# EAGLE board TrackerNoGPlane (EAGLE 8.3.2)
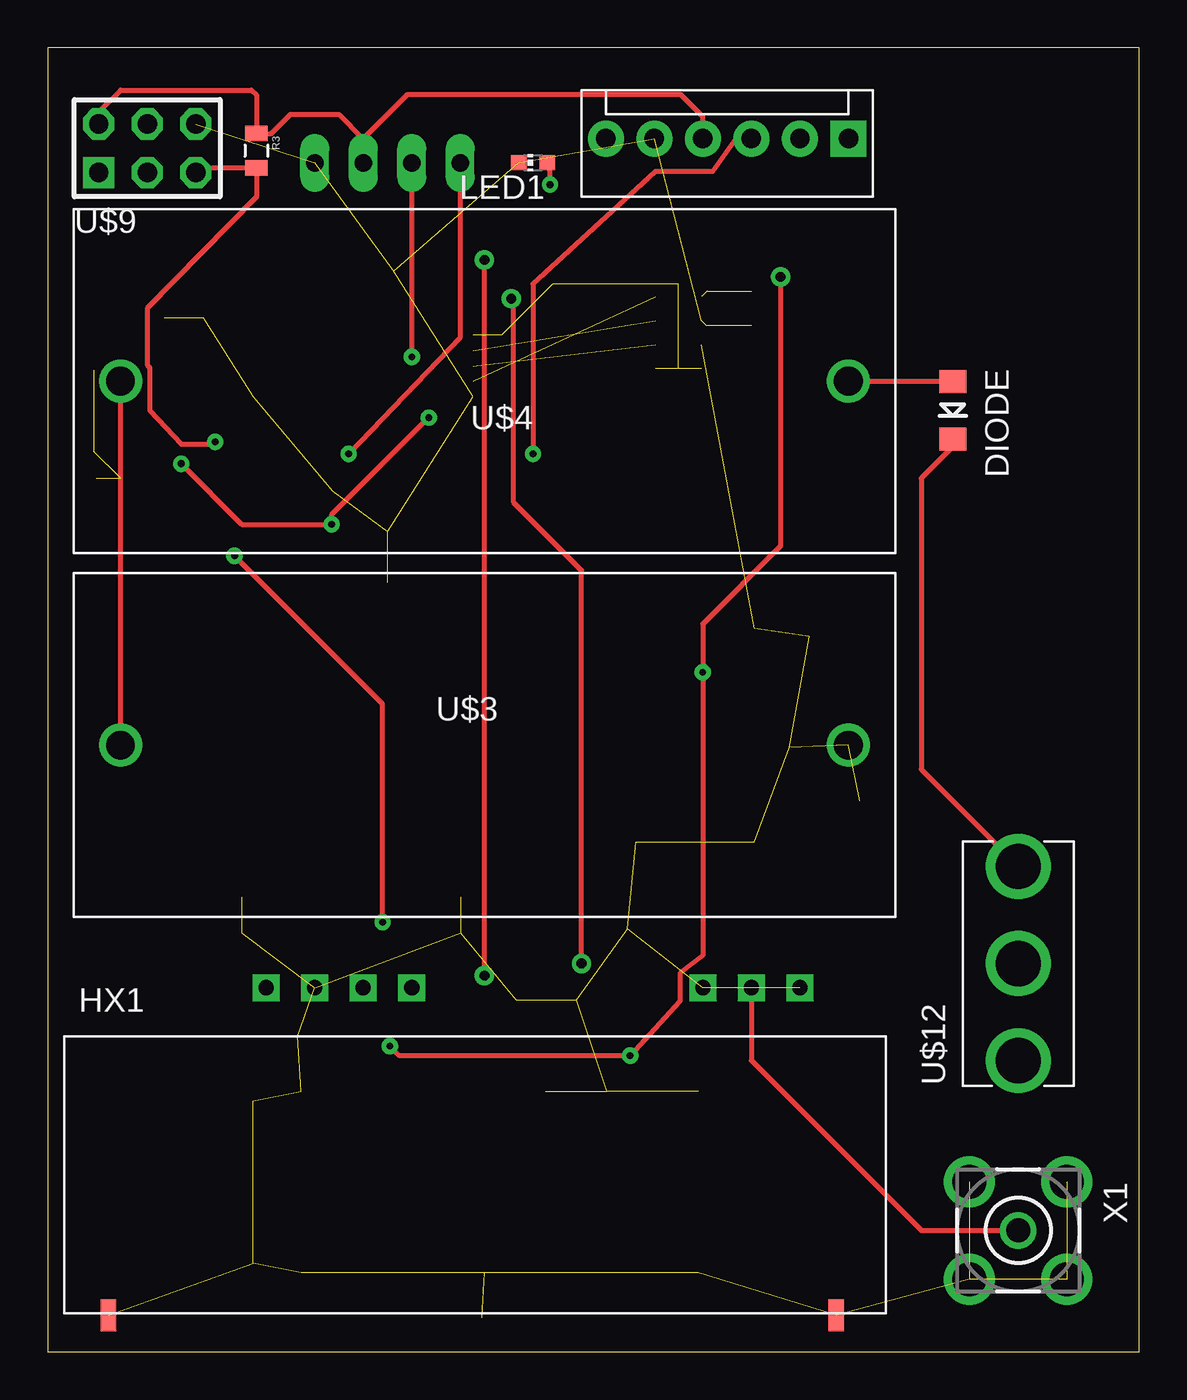
[diagram p0: board, top side]
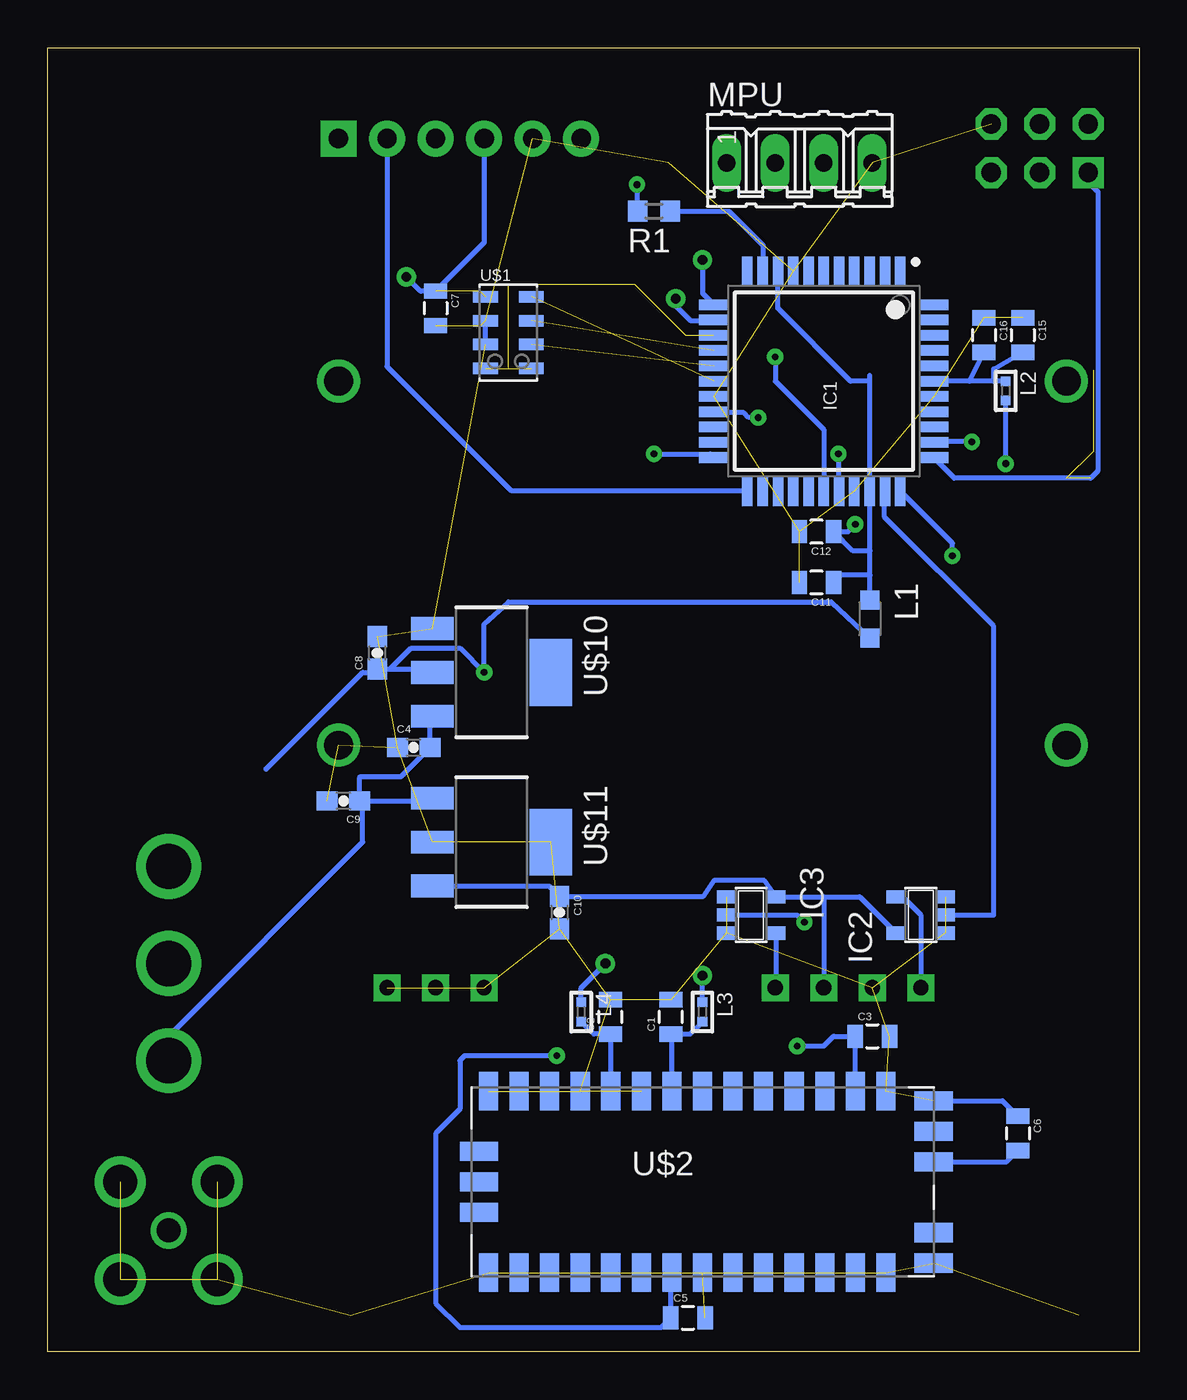
[diagram p1: board, bottom side, seen from below]

Size 57.13 x 68.25 mm. Coordinates in mm from the lower left corner, seen from the top.
Outline: 0,0 57.13,0 57.13,68.25 0,68.25 0,0
Copper layers (1*16): Top 0.035mm / dielectric 1.5mm / Bottom 0.035mm
Design rules "SparkFun": minimum track width 8mil, minimum drill 20mil, track to track 8mil, track to pad 8mil, pad to pad 8mil, via to via 8mil, smd to smd 8mil, copper to edge 8mil, drill to drill 8mil, minimum pad ring 12mil, minimum via ring 10mil, stop-mask expansion 4mil, vias tented up to drill 20mil, thermal gap 10mil

## Footprints (pad centres in the part's own frame; a part is rotated, then mirrored left to right if it is on the bottom)
0805 = smd 0.8 x 1.2: 1 -0.9,0; 2 0.9,0
0603-CAP = smd 1.1 x 1: 1 -0.85,0; 2 0.85,0
LILYPAD-WEARABLES_LED-1206 = smd 1.2 x 1.4: A -1.5,0; C 1.5,0
QFP80P1200X1200X120-44N = smd 1.55 x 0.55: 1 -5.75,4; 2 -5.75,3.2; 3 -5.75,2.4; 4 -5.75,1.6; 5 -5.75,0.8; 6 -5.75,0; 7 -5.75,-0.8; 8 -5.75,-1.6; 9 -5.75,-2.4; 10 -5.75,-3.2; 11 -5.75,-4; 23 5.75,-4; 24 5.75,-3.2; 25 5.75,-2.4; 26 5.75,-1.6; 27 5.75,-0.8; 28 5.75,0; 29 5.75,0.8; 30 5.75,1.6; 31 5.75,2.4; 32 5.75,3.2; 33 5.75,4 | smd 0.55 x 1.55: 12 -4,-5.75; 13 -3.2,-5.75; 14 -2.4,-5.75; 15 -1.6,-5.75; 16 -0.8,-5.75; 17 0,-5.75; 18 0.8,-5.75; 19 1.6,-5.75; 20 2.4,-5.75; 21 3.2,-5.75; 22 4,-5.75; 34 4,5.75; 35 3.2,5.75; 36 2.4,5.75; 37 1.6,5.75; 38 0.8,5.75; 39 0,5.75; 40 -0.8,5.75; 41 -1.6,5.75; 42 -2.4,5.75; 43 -3.2,5.75; 44 -4,5.75
SOT23-5 = smd 0.69 x 0.99: 1 -0.95,-1.29; 2 0,-1.29; 3 0.95,-1.29; 4 0.95,1.3; 5 -0.95,1.3
MOLEX-1X6 = drill 1.016 pad 1.88 square: 1 0,0 | drill 1.016 pad 1.88: 2 2.54,0; 3 5.08,0; 4 7.62,0; 5 10.16,0; 6 12.7,0
L2012C = smd 1 x 1: 1 -1,0; 2 1,0
L0402 = smd 0.5 x 0.5: 1 -0.508,0; 2 0.508,0
CHIP-LED0603 = smd 0.8 x 0.8: A 0,-0.75; C 0,0.75
HX1 = drill 0.8 square: 0V 25.4,-8.89; EN 20.32,-8.89; RFGND1 0,-8.89; RFGND2 5.08,-8.89; RFOUT 2.54,-8.89; TXD 27.94,-8.89; VCC 22.86,-8.89 | smd 0.813 x 1.676: BODYGND1 -1.905,8.255; BODYGND2 36.195,8.255
04P = drill 0.914 long: 1 -3.81,0; 2 -1.27,0; 3 1.27,0; 4 3.81,0
R0603 = smd 1 x 1.1: 1 -0.85,0; 2 0.85,0
MS5611-01BA01 = smd 1.3 x 0.6: 1 -1.2,1.875; 2 -1.2,0.625; 3 -1.2,-0.625; 4 -1.2,-1.875; 5 1.2,-1.875; 6 1.2,-0.625; 7 1.2,0.625; 8 1.2,1.875
M10382-A1 = smd 1 x 2: 1 -1.05,12.1; 2 -2.65,12.1; 3 -4.25,12.1; 18 -1.6,-11.7; 19 0,-11.7; 20 1.6,-11.7; 35 4.25,12.1; 36 2.65,12.1 | smd 2 x 1: 4 -4.75,9.6; 5 -4.75,8; 6 -4.75,6.4; 7 -4.75,4.8; 8 -4.75,3.2; 9 -4.75,1.6; 10 -4.75,0; 11 -4.75,-1.6; 12 -4.75,-3.2; 13 -4.75,-4.8; 14 -4.75,-6.4; 15 -4.75,-8; 16 -4.75,-9.6; 17 -4.75,-11.2; 21 4.75,-11.2; 22 4.75,-9.6; 23 4.75,-8; 24 4.75,-6.4; 25 4.75,-4.8; 26 4.75,-3.2; 27 4.75,-1.6; 28 4.75,0; 29 4.75,1.6; 30 4.75,3.2; 31 4.75,4.8; 32 4.75,6.4; 33 4.75,8; 34 4.75,9.6
CR-123-A_HOLDER = drill 1.5: + -19.05,0; - 19.05,0
AVR-ISP-6 = drill 1.016 square: 1 -2.54,-1.27 | drill 1.016 octagon: 2 -2.54,1.27; 3 0,-1.27; 4 0,1.27; 5 2.54,-1.27; 6 2.54,1.27
SOT-223 = smd 1.2 x 2.2: 1 -2.3,1.1; 2 0,1.1; 3 2.3,1.1 | smd 3.5 x 2.2: 4 0,7.3
ZMCHFL3R = drill 2.375: 1 -5.08,0; 2 0,0; 3 5.08,0
BU-SMA-V = drill 1.27: 1 0,0 | drill 1.778: 2 -2.55,2.55; 3 2.55,2.55; 4 2.55,-2.55; 5 -2.55,-2.55

## Placement (x,y rotation side)
C1  22pF  [0805]  24.51,17.53 90 bottom
C2  22pF  [0805]  27.69,17.53 90 bottom
C3  22pF  [0805]  13.97,16.51 0 bottom
C4  1uF  [0603-CAP]  37.97,31.62 0 bottom
C5  22pF  [0805]  23.62,1.78 0 bottom
C6  18pF  [0805]  6.35,11.43 270 bottom
C7  100nF  [0805]  36.83,54.61 270 bottom
C8  1uF  [0603-CAP]  39.88,36.58 90 bottom
C9  .47uF  [0603-CAP]  41.66,28.83 180 bottom
C10  22uF  [0603-CAP]  30.35,22.99 270 bottom
C11  10uF  [0805]  16.89,40.26 180 bottom
C12  100nF  [0805]  16.89,42.93 180 bottom
C15  10uF  [0805]  6.1,53.21 270 bottom
C16  100nF  [0805]  8.13,53.21 270 bottom
DIODE  [LILYPAD-WEARABLES_LED-1206]  47.37,49.28 270 top
IC1  [QFP80P1200X1200X120-44N]  16.51,50.8 270 bottom
IC2  74AHC1G125DBV  [SOT23-5]  11.43,22.86 90 bottom
IC3  74AHC1G125DBV  [SOT23-5]  20.32,22.86 270 bottom
JP4  [MOLEX-1X6]  41.91,63.5 180 top
L1  10uH  [L2012C]  14.1,38.35 270 bottom
L2  FB_0402  [L0402]  6.99,50.29 270 bottom
L3  FB_0402  [L0402]  22.86,17.78 270 bottom
L4  FB_0402  [L0402]  29.21,17.78 270 bottom
LED1  [CHIP-LED0603]  25.4,62.23 90 top
M1  HX1  [HX1]  39.37,10.16 180 top
MPU  [04P]  17.78,62.23 0 bottom
R1  220  [R0603]  25.4,59.69 180 bottom
R3  10kOhm  [0805]  10.92,62.87 270 top
U$1  MS5611QFN  [MS5611-01BA01]  33.02,53.34 0 bottom
U$2  M10382-A1  [M10382-A1]  22.86,8.89 270 bottom
U$3  123_BATTERY_HOLDERCR-123-A  [CR-123-A_HOLDER]  22.86,31.75 0 top
U$4  123_BATTERY_HOLDERCR-123-A  [CR-123-A_HOLDER]  22.86,50.8 180 top
U$9  AVR-PDIVERT  [AVR-ISP-6]  5.21,62.99 0 top
U$10  AZ1117EH3.3  [SOT-223]  38.1,35.56 270 bottom
U$11  LM2940-5  [SOT-223]  38.1,26.67 270 bottom
U$12  CKN10160-ND  [ZMCHFL3R]  50.8,20.32 90 top
X1  BU-SMA-V  [BU-SMA-V]  50.8,6.35 270 top

## Library data of the parts
C1-C12 C15 C16 JP4 R3 = SparkFun
DIODE U$10 U$11 = Physoon
IC1 = xmega-a4
IC2 IC3 = 74xx-little-us
L1 = rcl
L2-L4 = rc-master-smd
LED1 = led
M1 = trackuino
MPU = con-amp-quick; OC_FARNELL: unknown; OC_NEWARK: unknown
R1 = resistor
U$1-U$4 U$12 = SHC
U$9 = avr-7
X1 = con-coax; OC_FARNELL: unknown; OC_NEWARK: unknown

## Nets
5V: C10.1 IC2.5 IC3.5 M1.VCC U$11.3
BATT: C4.2 C9.1 U$10.3 U$11.1 U$12.1
EN-5V: IC3.4 M1.EN
GND: C1.2 C2.2 C3.2 C4.1 C5.2 C6.1 C6.2 C7.2 C8.2 C9.2 C10.2 C11.2 C12.2 C15.1 C16.1 IC1.8 IC1.18 IC1.30 IC1.38 IC2.1 IC2.3 IC3.1 IC3.3 JP4.5 LED1.C M1.0V M1.BODYGND1 M1.BODYGND2 M1.RFGND1 M1.RFGND2 MPU.4 U$1.2 U$1.3 U$2.1 U$2.2 U$2.3 U$2.4 U$2.12 U$2.14 U$2.17 U$2.21 U$2.24 U$2.26 U$2.28 U$2.33 U$2.34 U$2.35 U$2.36 U$3.- U$9.6 U$10.1 U$11.2 U$11.4 X1.2 X1.3 X1.4 X1.5
LED: IC1.10 R1.1
MISOC: IC1.16 U$1.6
MOSIC: IC1.15 U$1.7
N$1: C1.1 L3.2 U$2.11
N$2: C2.1 L4.2 U$2.13
N$4: U$3.+ U$4.-
N$5: M1.RFOUT X1.1
N$6: DIODE.A U$4.+
N$10: LED1.A R1.2
N$11: DIODE.C U$12.3
N$17: C15.2 C16.2 IC1.39 L2.1
N$18: C11.1 C12.1 IC1.9 IC1.19 IC1.31 L1.1 L2.2
PDI-CLK: IC1.35 R3.2 U$9.5
PDI-DATA: IC1.34 U$9.1
RXC: IC1.12 L3.1
RXD: IC1.22 JP4.3
RXE: IC1.32 IC2.2
SCLE: IC1.29 MPU.1
SCLKC: IC1.17 U$1.8
SDAD: IC1.28 MPU.2
SSC: IC1.14 U$1.4 U$1.5
TXC: IC1.13 L4.1
TXD: IC1.23 JP4.2
TXD-5V: IC2.4 M1.TXD
TXE: IC1.33 IC3.2
VCC: C3.1 C5.1 C7.1 C8.1 JP4.4 L1.2 MPU.3 R3.1 U$1.1 U$2.5 U$2.27 U$9.2 U$10.2

## Tracks (layer width: path | path; a pad name or v marks a point on that pad's centre or on a via)
5V
  Bottom 0.254: 16.51,23.81 IC3.5 19.64,24.69 22.22,24.69 22.82,23.84 C10.1 30.89,24.37 U$11.3 | 16.51,23.81 14.63,23.81 IC2.5 | 16.51,23.81 M1.VCC
BATT
  Bottom 0.254: C4.2 37,31.5 | C4.2 37.12,33.14 U$10.3 | U$12.1 50.8,16.51 40.64,26.67 40.64,28.66 C9.1 | C4.2 38.65,30.1 40.77,30.1 40.81,30.06 C9.1 | C9.1 37.14,28.83 U$11.1
EN-5V
  Bottom 0.254: IC3.4 19.02,19.08 M1.EN
GND  (54 unrouted)
  Bottom 0.254: U$1.3 U$1.2 | U$2.3 7.16,13.14 C6.1 | U$2.1 6.94,9.94 C6.2
LED
  Bottom 0.254: R1.1 22.86,59.69 | 22.86,59.69 22.2,59.69 | 22.86,59.69 21.46,59.69 19.68,57.91 19.68,56.58 IC1.10
MISOC  (1 unrouted)
MOSIC  (1 unrouted)
N$1
  Bottom 0.254: U$2.11 24.46,16.57 C1.1 23.51,16.63 L3.2
N$2
  Bottom 0.254: U$2.13 27.66,16.6 C2.1 28.56,16.63 L4.2
N$4
  Top 0.254: U$3.+ U$4.-
N$5
  Top 0.254: M1.RFOUT 36.83,15.24 45.72,6.35 X1.1
N$6
  Top 0.254: U$4.+ 47.35,50.8 DIODE.A
N$10  (via drill 0.35)
  Top 0.254: v26.29,61.09 26.29,62.09 LED1.A
  Bottom 0.254: R1.2 26.25,61.05 v26.29,61.09
N$11
  Top 0.254: DIODE.C 47.37,47.37 45.72,45.72 45.72,30.48 U$12.3
N$17
  Bottom 0.254: L2.1 7.62,50.8 | 7.62,50.8 8.89,50.8 | 8.89,50.8 IC1.39 | 8.89,50.8 C16.2 | 7.62,50.8 7.62,51.44 C15.2
N$18  (via drill 0.35)
  Top 0.254: v6.99,46.48 10.16,43.31 v14.86,43.31 14.86,43.81 v19.94,48.9
  Bottom 0.254: L1.1 14.1,40.64 | 14.1,40.64 14.1,41.91 | 14.1,41.91 14.1,45.04 IC1.31 14.11,50.8 | 14.1,40.64 15.61,40.64 C11.1 | 14.1,41.91 14.97,41.91 C12.1 15.24,42.93 v14.86,43.31 | v6.99,46.48 L2.2 | 14.11,50.8 14.11,51.1 | v19.94,48.9 20.45,48.9 20.7,49.15 22.21,49.15 IC1.19 | 14.11,50.8 15.11,50.8 18.92,54.61 18.92,56.54 IC1.9
PDI-CLK  (via drill 0.35)
  Top 0.254: U$9.5 7.99,61.97 R3.2 10.92,60.45 5.21,54.61 5.21,51.64 5.34,51.51 5.34,49.27 6.99,47.5 8.64,47.5 v8.76,47.62
  Bottom 0.254: v8.76,47.62 10.73,47.62 IC1.35
PDI-DATA  (3 unrouted)
  Bottom 0.254: IC1.34 9.68,45.72 2.54,45.72 2.16,46.1 2.16,60.71 2.67,61.21 U$9.1
RXC  (via drill 0.51)
  Top 0.254: v22.86,19.68 v22.86,57.15
  Bottom 0.254: L3.1 v22.86,19.68 | v22.86,57.15 22.86,55.4 IC1.12
RXD  (via drill 0.35)
  Top 0.254: JP4.3 36.01,63.5 34.8,61.77 31.8,61.77 25.4,55.88 v25.4,46.99
  Bottom 0.254: v25.4,46.99 22.45,46.99 IC1.22
RXE
  Bottom 0.254: IC2.2 7.62,22.86 7.62,37.97 13.34,43.69 13.34,45.02 IC1.32
SCLE  (via drill 0.35)
  Top 0.254: MPU.1 21.59,53.09 v15.75,46.99
  Bottom 0.254: IC1.29 15.71,46.95 v15.75,46.99
SCLKC  (1 unrouted)
SDAD  (via drill 0.35)
  Top 0.254: MPU.2 v19.05,52.07
  Bottom 0.254: v19.05,52.07 19.05,50.8 16.51,48.26 IC1.28
SSC  (6 unrouted)
  Bottom 0.254: 22.27,53.21 IC1.14
TXC  (via drill 0.51)
  Top 0.254: v27.94,20.32 27.94,40.89 24.38,44.45 24.38,54.99 v24.26,55.12
  Bottom 0.254: L4.1 29.21,19.05 v27.94,20.32 | v24.26,55.12 24.26,54.74 23.5,53.98 22.29,53.98 IC1.13
TXD
  Bottom 0.254: JP4.2 39.37,51.56 32.89,45.09 20.55,45.09 IC1.23
TXD-5V
  Bottom 0.254: IC2.4 12.38,23.81 11.43,22.86 M1.TXD
TXE  (via drill 0.35)
  Top 0.254: v17.53,22.48 17.53,33.91 v9.78,41.66
  Bottom 0.254: IC3.2 17.91,22.86 v17.53,22.48 | v9.78,41.66 9.78,42.32 IC1.33
VCC  (via drill 0.35, 0.51)  (2 unrouted)
  Top 0.254: v17.91,16 18.41,15.49 v30.48,15.49 33.1,18.37 33.1,19.82 34.29,20.75 v34.29,35.56 34.29,38.1 38.35,42.16 v38.35,56.26 | U$9.2 2.67,64.9 3.81,66.04 10.67,66.04 10.92,65.79 R3.1 11.7,63.77 12.7,64.77 15.24,64.77 16.51,63.5 | 16.51,63.5 MPU.3 | JP4.4 34.29,64.64 33.15,65.79 18.8,65.79 16.51,63.5
  Bottom 0.254: 45.72,30.48 40.64,35.56 40.04,35.56 C8.1 | JP4.4 34.29,58.05 C7.1 37.6,55.51 v38.35,56.26 | U$2.5 C3.1 16,16.51 16.51,16 v17.91,16 | U$2.27 24.52,4.08 C5.1 25.03,1.27 35.56,1.27 36.83,2.54 36.83,11.43 35.56,12.7 35.56,15.24 35.31,15.49 v30.48,15.49 | C8.1 37.17,35.73 U$10.2 | C8.1 39.2,35.73 38.1,36.83 35.56,36.83 v34.29,35.56 34.29,38.1 33.02,39.24 16.11,39.24 L1.2